# Altium PCB PCB-Power-Managemet-pcb.PcbDoc
Units mm, origin at the board's own origin, x right, y up, seen from the top; angles counter-clockwise.
Board outline 80 x 80.5 mm, 2 copper layers (Top Layer, Bottom Layer), stack 3.21 mm thick; 31 components, 22 nets, 78 pads, 2 vias.
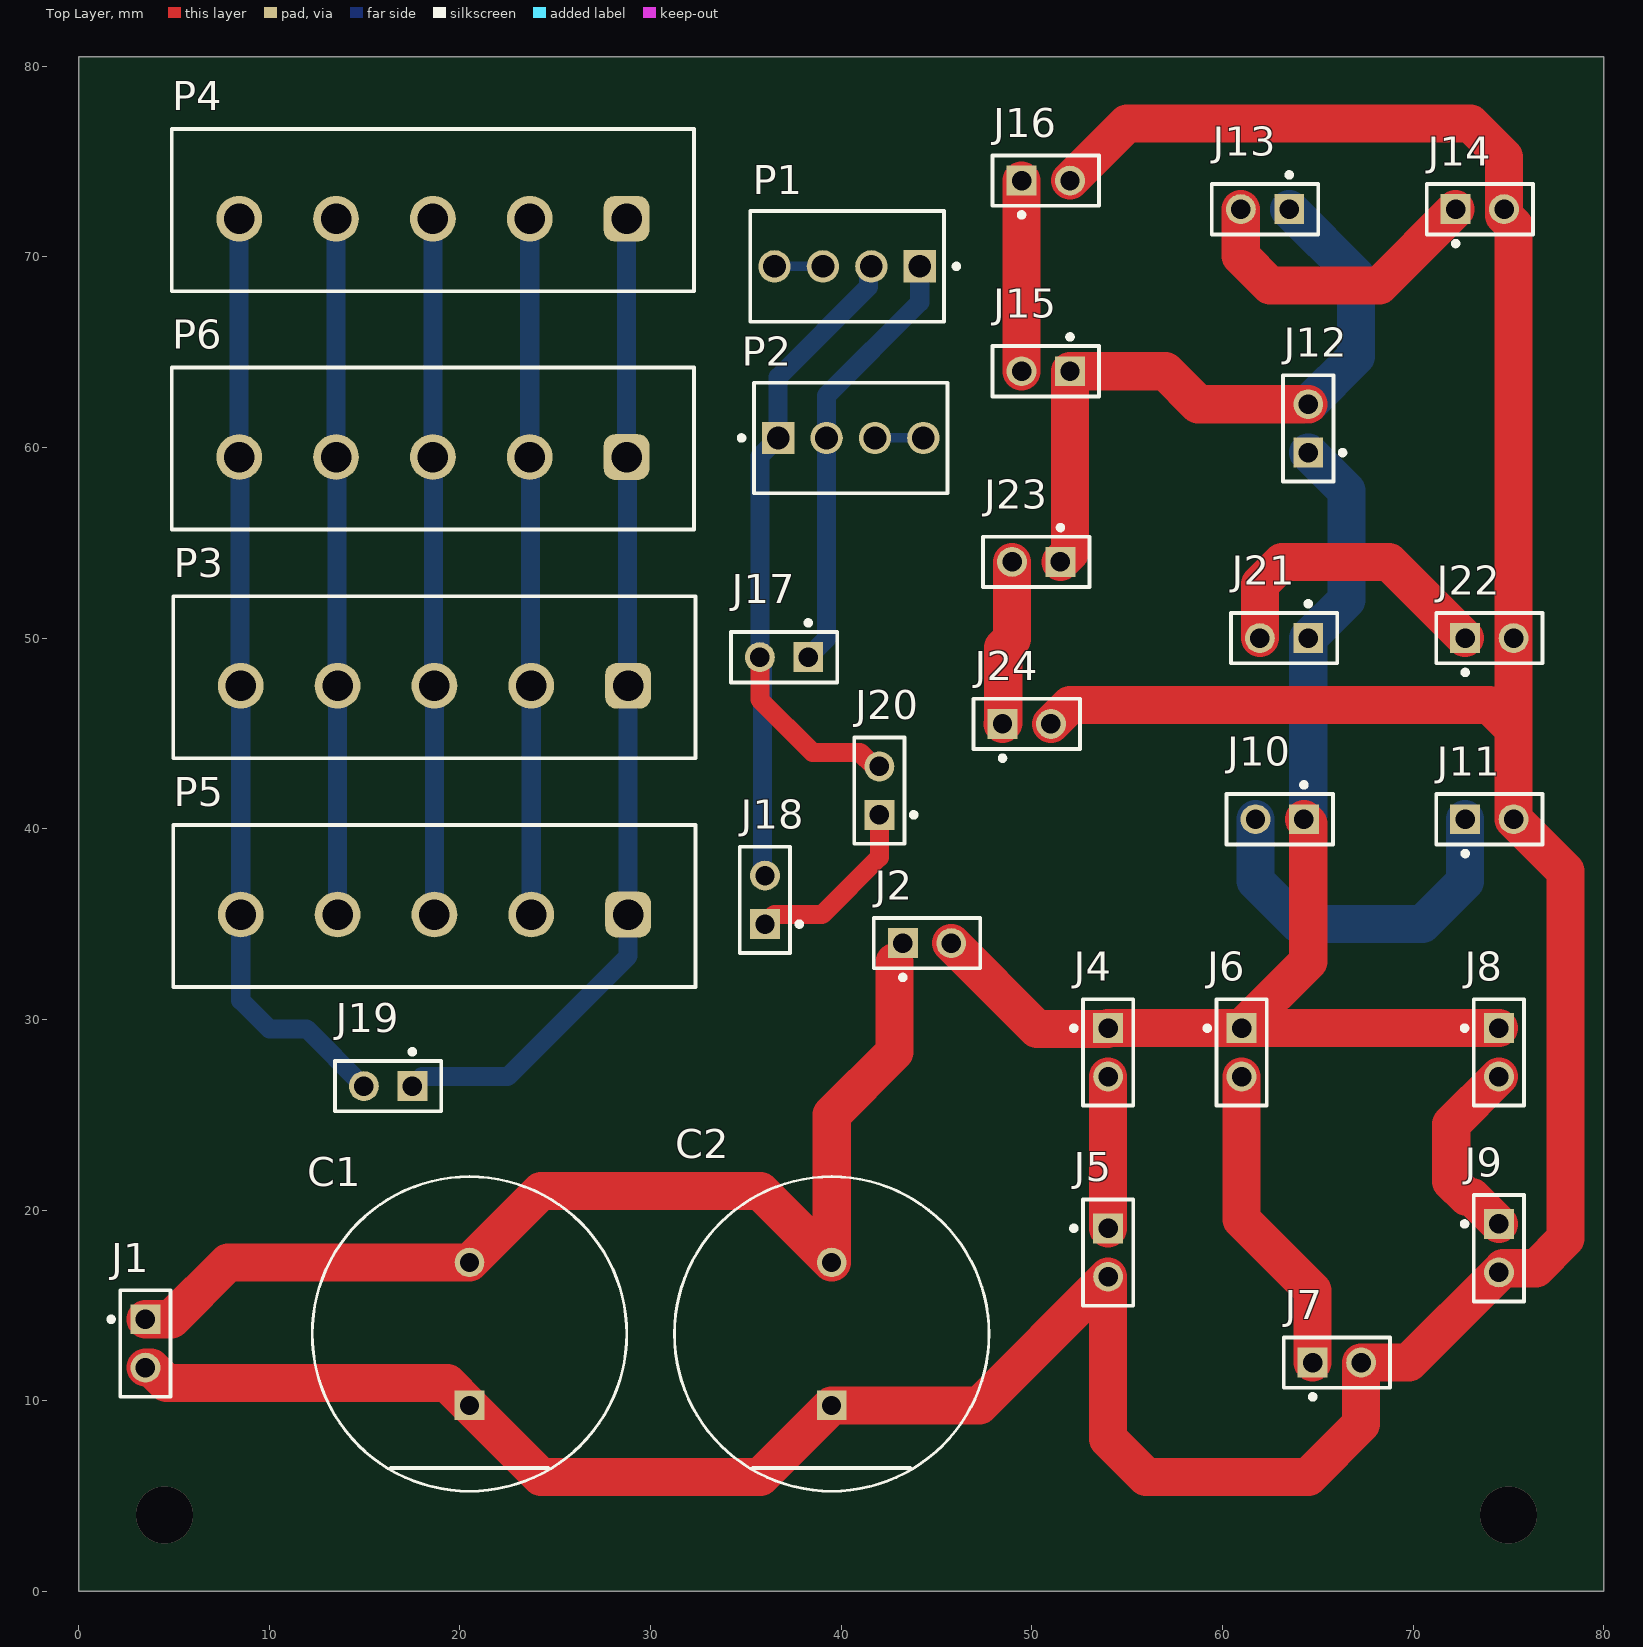
[diagram p0: Top Layer view]
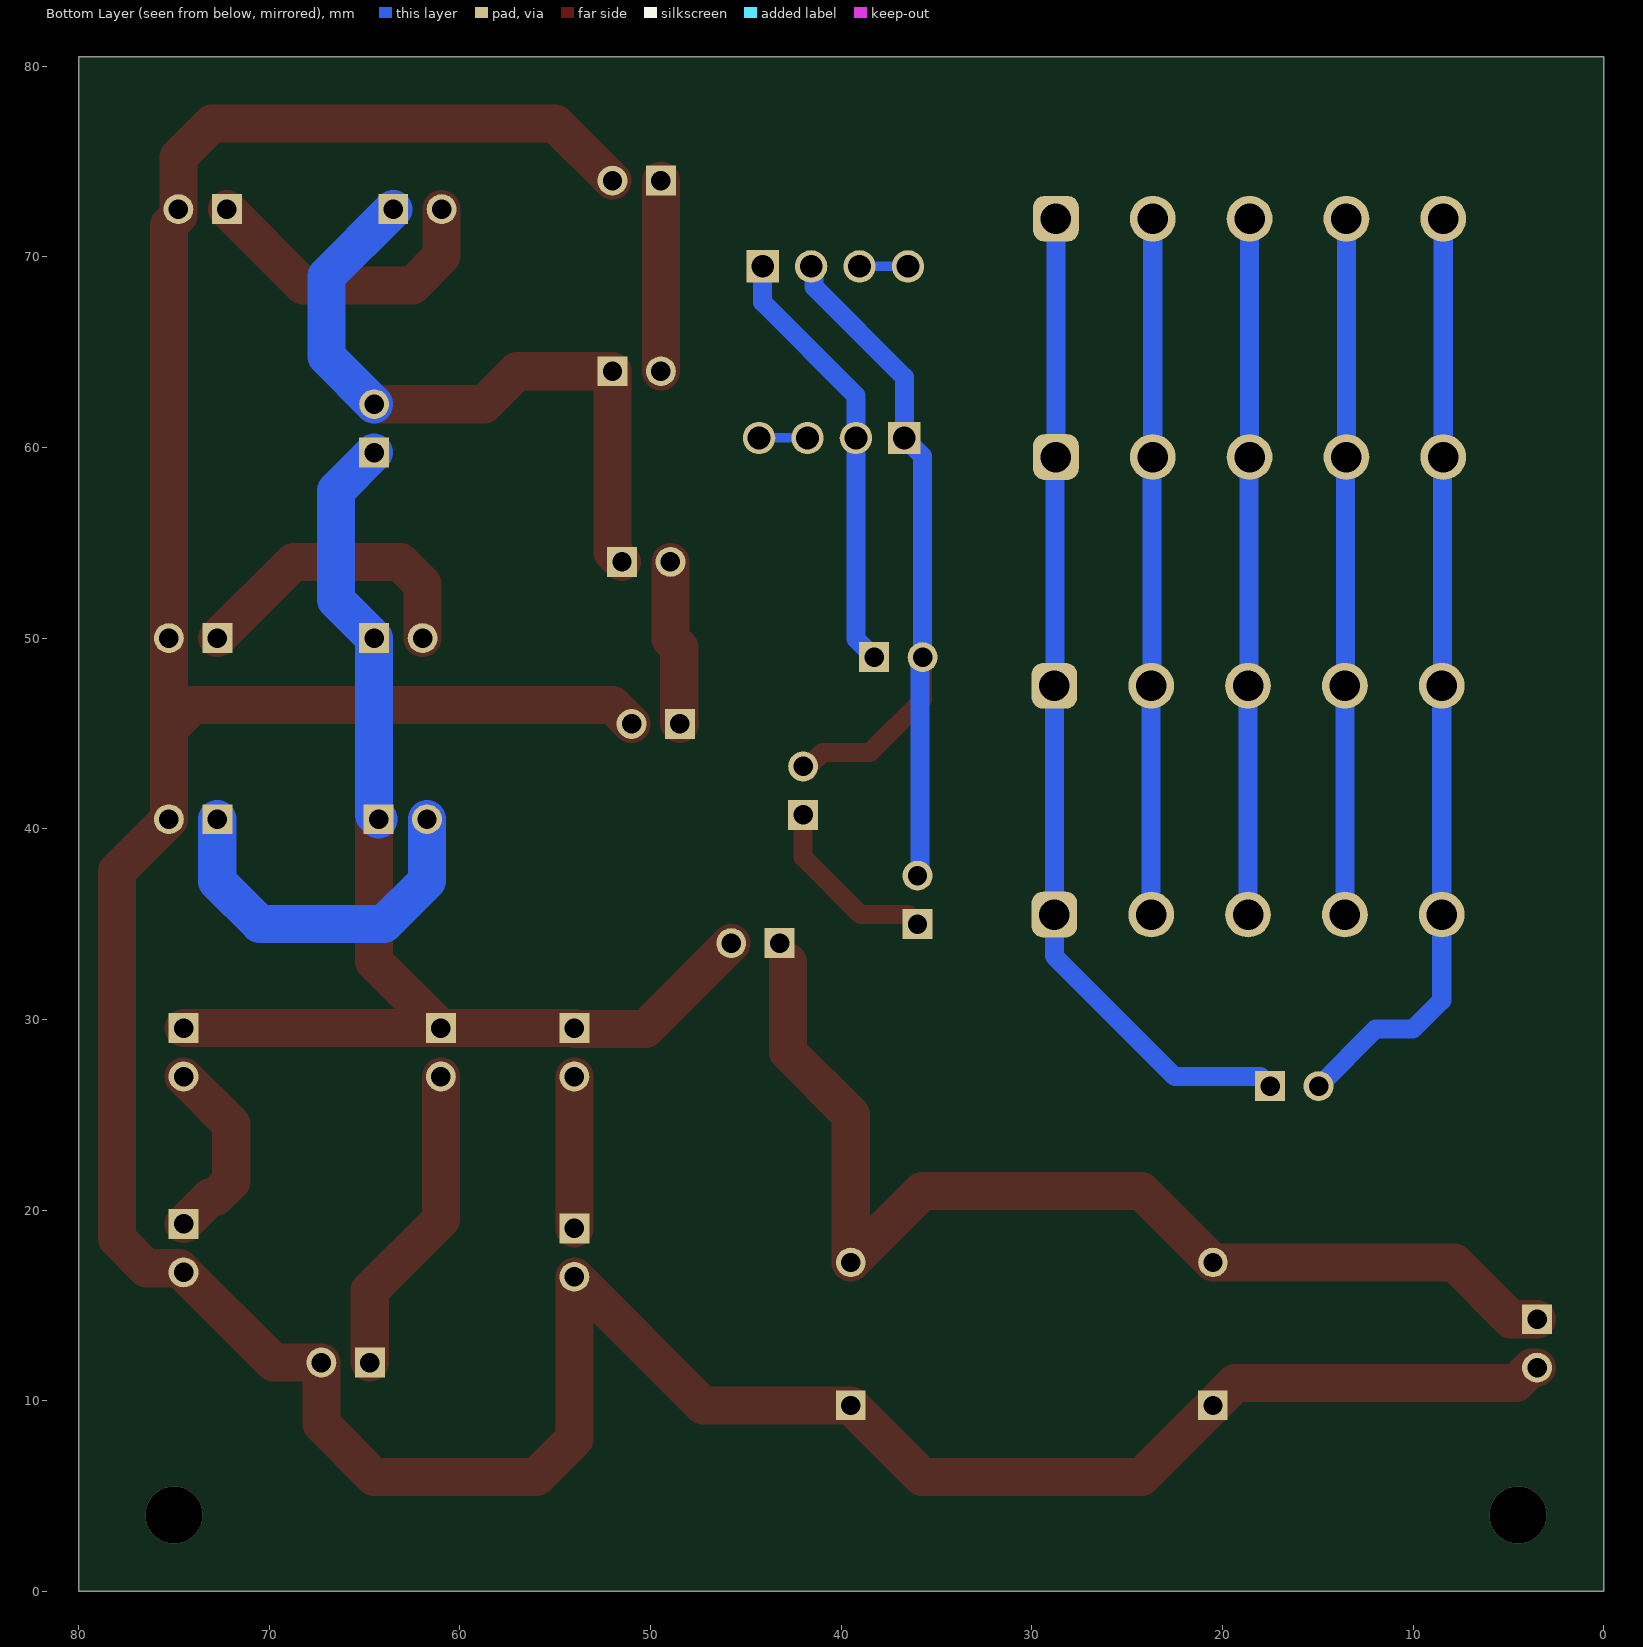
[diagram p1: Bottom Layer view, seen from below]
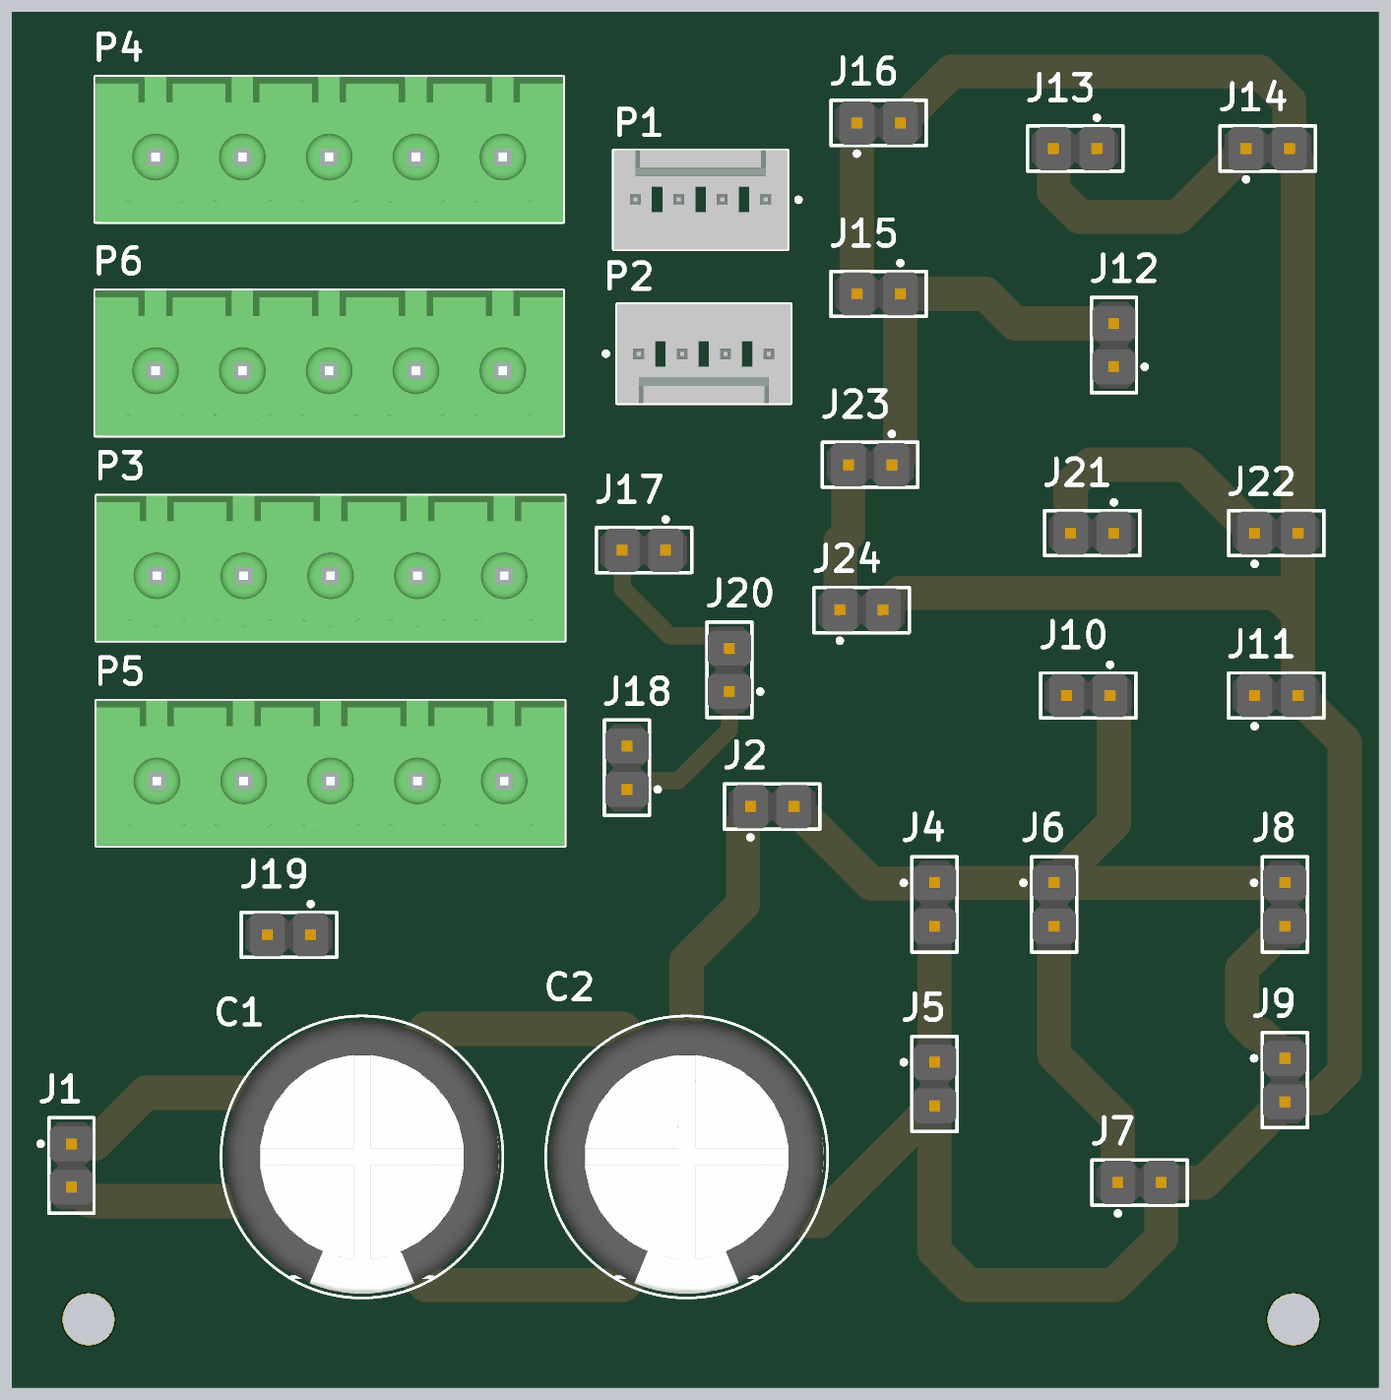
[diagram p2: 3D render of the assembled board from above, using the file's embedded part models]

## Layer stack, top to bottom
Top Solder: solder mask 0.0102, Solder Resist, Dk 3.5
Top Layer: signal copper 0.105
Dielectric 1: dielectric 3, FR-4, Dk 4.8
Bottom Layer: signal copper 0.105
Bottom Solder: solder mask 0.0102, Solder Resist, Dk 3.5

## Board outline
0,0 0,80.5 80,80.5 80,0

## Design rules (kind name [scope] priority, off if disabled: settings)
Clearance [All] p1: gap=0.3 ignorepadtopadclearanceinfootprint=FALSE
PolygonConnect [All] p1: connectstyle=Relief reliefconductorwidth=0.254 reliefentries=4 polygonreliefangle="90 Angle" airgapwidth=0.254
RoutingVias [All] p1: holewidth=1 width=1.2 viastyle="Through Hole" minholewidth=1 minwidth=1.2 maxholewidth=1 maxwidth=1.2
SilkToSolderMaskClearance [IsPad] p1: minsilkscreentomaskgap=0.2 clearancetoexposedcopper=TRUE
SolderMaskExpansion [All] p1: expansion=0.102 istentingtop=FALSE
Width [All] p1: maxlimit=2.5 minlimit=0.1 preferedwidth=2 bottomlayer_maxwidth=1.2 bottomlayer_prefwidth=1 minimp=50.000000 maximp=50.000000 favimp=50.000000
29 further rules are at their usual default settings.

## Components (designator, comment, footprint, x,y, rotation, side; value= is the part's Value field where it differs from the comment)
C1 "cap01" FP-RAD-TH-D_16_0_5-L_25_2-MFG 20.5,13.5 r90 top
C2 "cap02" FP-RAD-TH-D_16_0_5-L_25_2-MFG 39.5,13.5 r90 top
J1 "PowerSupply" FP-M20-9990245-MFG 3.5,13 r270 top
J2 "MainSwitch" FP-M20-9990245-MFG 44.5,34 r0 top
J4 "SW01" FP-M20-9990245-MFG 54,28.27 r270 top
J5 "SW02" FP-M20-9990245-MFG 54,17.77 r270 top
J6 "SW03" FP-M20-9990245-MFG 61,28.27 r270 top
J7 "SW04" FP-M20-9990245-MFG 66,12 r0 top
J8 "SW05" FP-M20-9990245-MFG 74.5,28.27 r270 top
J9 "SW07" FP-M20-9990245-MFG 74.5,18 r270 top
J10 "SW08" FP-M20-9990245-MFG 63,40.5 r180 top
J11 "SW09" FP-M20-9990245-MFG 74,40.5 r0 top
J12 "SubSwitch" FP-M20-9990245-MFG 64.5,61 r90 top
J13 "SW10" FP-M20-9990245-MFG 62.23,72.5 r180 top
J14 "SW11" FP-M20-9990245-MFG 73.5,72.5 r0 top
J15 "SW12" FP-M20-9990245-MFG 50.73,64 r180 top
J16 "SW13" FP-M20-9990245-MFG 50.73,74 r0 top
J17 "Vcc" FP-M20-9990245-MFG 37,49 r180 top
J18 "Rel2" FP-M20-9990245-MFG 36,36.27 r90 top
J19 "VoltageSensor" FP-M20-9990245-MFG 16.23,26.5 r180 top
J20 "VoltageSensor" FP-M20-9990245-MFG 42,42 r90 top
J21 "SW10-ex" FP-M20-9990245-MFG 63.23,50 r180 top
J22 "SW11-ex" FP-M20-9990245-MFG 74,50 r0 top
J23 "SW14-ex" FP-M20-9990245-MFG 50.23,54 r180 top
J24 "SW15-ex" FP-M20-9990245-MFG 49.73,45.5 r0 top
P1 "Rel01" MOLX-22-27-2041_V 40.31,69.5 r0 top
P2 "VoltageSensor" MOLX-22-27-2041_V 40.5,60.5 r180 top
P3 "BMS" 691311500105 18.66,47.95 r180 top
P4 "battery" 691311500105 18.58,72.45 r180 top
P5 "beeper" 691311500105 18.66,35.95 r180 top
P6 "ex" 691311500105 18.58,59.95 r180 top

## Footprints (in the part's own frame and the unit in brackets; to place one, negate y for a bottom-side part, rotate by r counter-clockwise, add the part's x,y. Pads: shape width x height; smd on the part's side, far side on the other; paste and mask are expansions set on the pad)
691311500105 [mm] "5,08mm - PCB Headers - Vertical - Closed ends -05p"
  rrect50% 2.4x2.4 hole 1.6: 1(-10.16,0.45)
  round 2.4 hole 1.6: 2(-5.08,0.45) 3(0,0.45) 4(5.08,0.45) 5(10.16,0.45)
  silkscreen extent -13.7,-4.25 13.7,4.25, body extent -13.7,-4.25 13.7,4.25, height 12.05
FP-M20-9990245-MFG [mm]
  rect 1.57x1.57 hole 1.02 paste-1000 mask+0: 1(-1.27,0)
  round 1.57 hole 1.02 paste-1000 mask+0: 2(1.27,0)
  silkscreen extent -2.79,-1.92 2.79,1.32, body extent -2.89,-1.42 2.89,1.42, height 0.25
FP-RAD-TH-D_16_0_5-L_25_2-MFG [mm]
  rect 1.55x1.55 hole 1 paste-1000 mask+0: 1(-3.75,0)
  round 1.55 hole 1 paste-1000 mask+0: 2(3.75,0)
  silkscreen extent -8.25,-8.25 8.25,8.25, body extent -8.35,-8.35 8.35,8.35, height 0.25
MOLX-22-27-2041_V [mm] "CONN, 4-Leads, Body 10.16x5.8mm, Pitch 2.54mm"
  rect 1.7x1.7 hole 1.19: 1(3.81,0)
  round 1.7 hole 1.19: 2(1.27,0) 3(-1.27,0) 4(-3.81,0)
  silkscreen extent -5.08,-2.9 5.86,2.9, body extent -5.08,-2.9 5.08,2.9, height 11.7

## Part data
C1 C2: library part CMP-05427-000445-1, "Aluminum Electrolytic Capacitors (Radial Lead Type) 4700uF ±20% 16V", Capacitance=4.7mF, Case/Package=Radial, ESR (Equivalent Series Resistance)=14mR, Max Operating Temperature=105°C, Min Operating Temperature=-40°C, Package Quantity=100, Ripple Current=3.82A, Tolerance=20%, Voltage=16V, Construction=RADIAL, Contact Plating=Tin, Diameter=16mm, Height=25mm, Height - Seated (Max)=1.063inch, Impedance=14mR, Lead Diameter=0.8mm, Lead Pitch=7.5mm, Lead/Base Style=Straight, Length=25mm, Life (Hours)=10000Hour, Mount="Through Hole", Number of Pins=2, Packaging=Bulk, Radiation Hardening=No, REACH SVHC="No SVHC", Ripple Current (AC)=3.82A, RoHS Compliant=Yes, Series=FR, Termination=Radial, Voltage Rating=16V, Voltage Rating (DC)=16V
J1 J2 J4 J5 J6 J7 J8 J9 J10 J11 J12 J13 J14 J15 J16 J17 J18 J19 J20 J21 J22 J23 J24: library part CMP-15831-000105-1, "CONN HEADER VERT 2POS 2.54MM", Case/Package=SIL, Color=Black, Contact Resistance=25mR, Current=3A, Flammability Rating="UL94 V-0", Insulation Resistance=10GR, Max Operating Temperature=105°C, Min Operating Temperature=-40°C, Package Quantity=1000, Voltage=50V, Voltage Rating (AC)=750V, Connector Type="Male Pin", Contact Finish - Mating=GOLD, Contact Material=Brass, Contact Mating Length=0.24inch, Contact Plating=Gold, Contact Shape=Square, Contact Type="Male Pin", Current Rating=3A, Depth=2.54mm, Fastening Type=Pull, Gender=Male, Height=0.12inch, Housing Color=Black, Housing Material=Nylon, Insulation Color=Black, Insulation Material=Nylon, Lead Pitch=2.54mm, Length=5.08mm, Mated Stacking Heights=16.54mm, Mating Cycles=300, Max Current Rating=3A, Mount="Through Hole", Number Of Contacts=2, Number of Poles=2, Number of Positions=2, Number Of Rows=1, Orientation=Straight, Packaging=Bulk, Pitch=2.54mm, Radiation Hardening=No, Reach SVHC Compliant=Yes, Series=M20, Termination=Solder, Weight=0.25lb, Width=0.25inch, Working Voltage=750V
P1 P2: library part CMP-2000-05243-1, "Male Header, Pitch 2.54 mm, 1 x 4 Position, Height 11.7 mm, Tail Length 3.56 mm, RoHS, Bulk", Current Rating=4A, Manufacturer=Molex, Operating Temperature=0degCto+75degC, Voltage Rating=250V, Contact Material=Tinplatedbrass, Datasheet URL=http://www.molex.com/pdm_docs/sd/022272041_sd.pdf, Datasheet Version="Rev. F, 06/2009", Housing Material=Nylon(UL94V-0), Manufacturer URL=http://www.molex.com/
P3 P4 P5 P6: library part CMP-1502-02149-2, Color=Green, Current=20A, Voltage=300V, Contact Material=Brass, Contact Plating=Tin, Gender=Male, Height=12mm, Lead Pitch=5.08mm, Length=8.5mm, Mount="Through Hole", NexarPartId=8917750, Number Of Contacts=5, Number of Levels=1, Number of Pins=5, Number of Positions Per Level=5, Number Of Rows=1, Orientation=Vertical, Packaging=Box, Pitch=5.08mm, REACH SVHC="No SVHC", RoHS=Compliant, Termination=Solder, Width=27.4mm

## Via types
v1: diameter 3, hole 3, Top Layer to Bottom Layer, 2 vias

## Nets (pads, with @x,y where several pads share a name; then routed paths per layer and width w, separated by ;. In a path a pad name is that pad's centre, name@x,y a point inside that pad or via, vN(x,y) a via of type N, cw(c..) or ccw(c..) an arc to the next point about the centre after c; other vN are vias at no path point)
5V: J17.1 P1.1 P2.2 | length 22.9
  Bottom Layer w1: J17.1 39.23,49.96 P2.2 39.23,62.73 44.12,67.62 P1.1
B+: J19.1 P3.1 P4.1 P5.1 P6.1 | length 52.9
  Bottom Layer w1: J19.1 18,27 22.5,27 28.82,33.32 P5.1 P3.1 28.78,47.54 28.78,59.46 P6.1 P4.1
B-: J19.2 P3.5 P4.5 P5.5 P6.5 | length 49.4
  Bottom Layer w1: P4.5 P6.5 8.46,59.46 8.46,47.54 P3.5 P5.5 8.5,31 10,29.5 11.96,29.5 J19.2
C1+: P3.4 P4.4 P5.4 P6.4 | length 36.5
  Bottom Layer w0.3: P6.4 P6.4@13.54,59.46 ; P3.4@13.54,47.54 P3.4 ; P5.4@13.569,35.511 P5.4
  Bottom Layer w1: P6.4 P4.4 ; P3.4@13.54,47.54 P6.4@13.54,59.46 ; P5.4 P3.4
C2+: P3.3 P4.3 P5.3 P6.3 | length 36.5
  Bottom Layer w1: P4.3@18.572,71.992 P4.3 P6.3 18.62,59.46 18.62,47.54 P3.3 P5.3
C3+: P3.2 P4.2 P5.2 P6.2 | length 36.5
  Bottom Layer w1: P4.2 P6.2 23.7,59.46 23.7,47.54 P3.2 P5.2
GND: J17.2 J18.2 J20.2 P1.2 P2.1 | length 44.4
  Top Layer w1: J17.2 35.73,46.77 38.5,44 40.983,44 41.714,43.27 J20.2
  Bottom Layer w1: J18.2 35.865,37.675 35.865,48.865 J17.2 35.73,59.54 P2.1 36.69,63.69 41.421,68.421 41.421,69.341 P1.2
NetC1_1: C1.1 C2.1 J1.2 J5.2 J7.2 J9.2 J11.2 J14.2 J16.2 J22.2 J24.2 | length 205.3
  Top Layer w2: J1.2 3.795,11.73 4.607,10.919 19.332,10.919 C1.1 24.25,6 35.75,6 C2.1 47.25,9.75 J5.2 54,8 56,6 64.5,6 67.27,8.77 J7.2 69.77,12 J9.2 ; J24.2 52,46.5 74,46.5 75.27,45.23 ; J16.2 55,77 73,77 74.77,75.23 J14.2 74.77,72.178 75.27,71.678 J22.2 75.27,46 75.27,45.23 ; J9.2@74.713,16.943 76.443,16.943 78,18.5 78,37.77 J11.2 75.27,45.23
NetC1_2: C1.2 C2.2 J1.1 J2.1 | length 57.5
  Top Layer w2: J1.1 4.856,14.27 7.837,17.25 C1.2 24.25,21 35.75,21 C2.2 39.5,25 42.795,28.295 42.795,33
NetJ2_2: J2.2 J4.1 J6.1 J8.1 J10.1 J12.1 J21.1 | length 64.1
  Top Layer w2: J2.2 50.27,29.5 53.96,29.5 J4.1 J6.1 ; J10.1 64.5,40.27 64.5,33.04 J6.1 ; J8.1 J6.1
  Bottom Layer w2: J10.1 64.5,40.73 J21.1 66.5,52 66.5,57.73 J12.1
NetJ4_2: J4.2 J5.1 | length 8
  Top Layer w2: J5.1 J4.2
NetJ6_2: J6.2 J7.1 | length 16.5
  Top Layer w2: J6.2 61,19.5 64.73,15.77 J7.1
NetJ8_2: J8.2 J9.1 | length 10
  Top Layer w2: J9.1 73.088,20.682 72.818,20.682 72,21.5 72,24.5 J8.2
NetJ10_2: J10.2 J11.1 | length 19.4
  Bottom Layer w2: J10.2 61.73,37.27 64,35 70.5,35 72.73,37.23 J11.1
NetJ12_2: J12.2 J13.1 J15.1 J23.1 | length 36.1
  Top Layer w2: J23.1 52,54.5 J15.1 57,64 58.73,62.27 J12.2
  Bottom Layer w2: J13.1 67,69 67,64.77 J12.2
NetJ13_2: J13.2 J14.1 | length 16
  Top Layer w2: J13.2 60.96,70.04 62.5,68.5 68.23,68.5 J14.1
NetJ15_2: J15.2 J16.1 | length 10
  Top Layer w2: J15.2 J16.1
NetJ21_2: J21.2 J22.1 | length 15.7
  Top Layer w2: J21.2 61.96,52.828 63.132,54 68.73,54 J22.1
NetJ23_2: J23.2 J24.1 | length 8.7
  Top Layer w2: J24.1 48.5,45.54 48.5,49.5 48.96,49.96 J23.2
Rel2-Signal: J18.1 J20.1 | length 9.7
  Top Layer w1: J18.1 36.5,35.5 39,35.5 42,38.5 J20.1
S1: P1.3 P1.4 | length 2.5
  Bottom Layer w0.5: P1.4 P1.3
S2: P2.3 P2.4 | length 2.5
  Bottom Layer w0.5: P2.3 P2.4
copper on no net:
  other v1: 4.5,4 75,4